# EAGLE board display-demo (EAGLE 4.16)
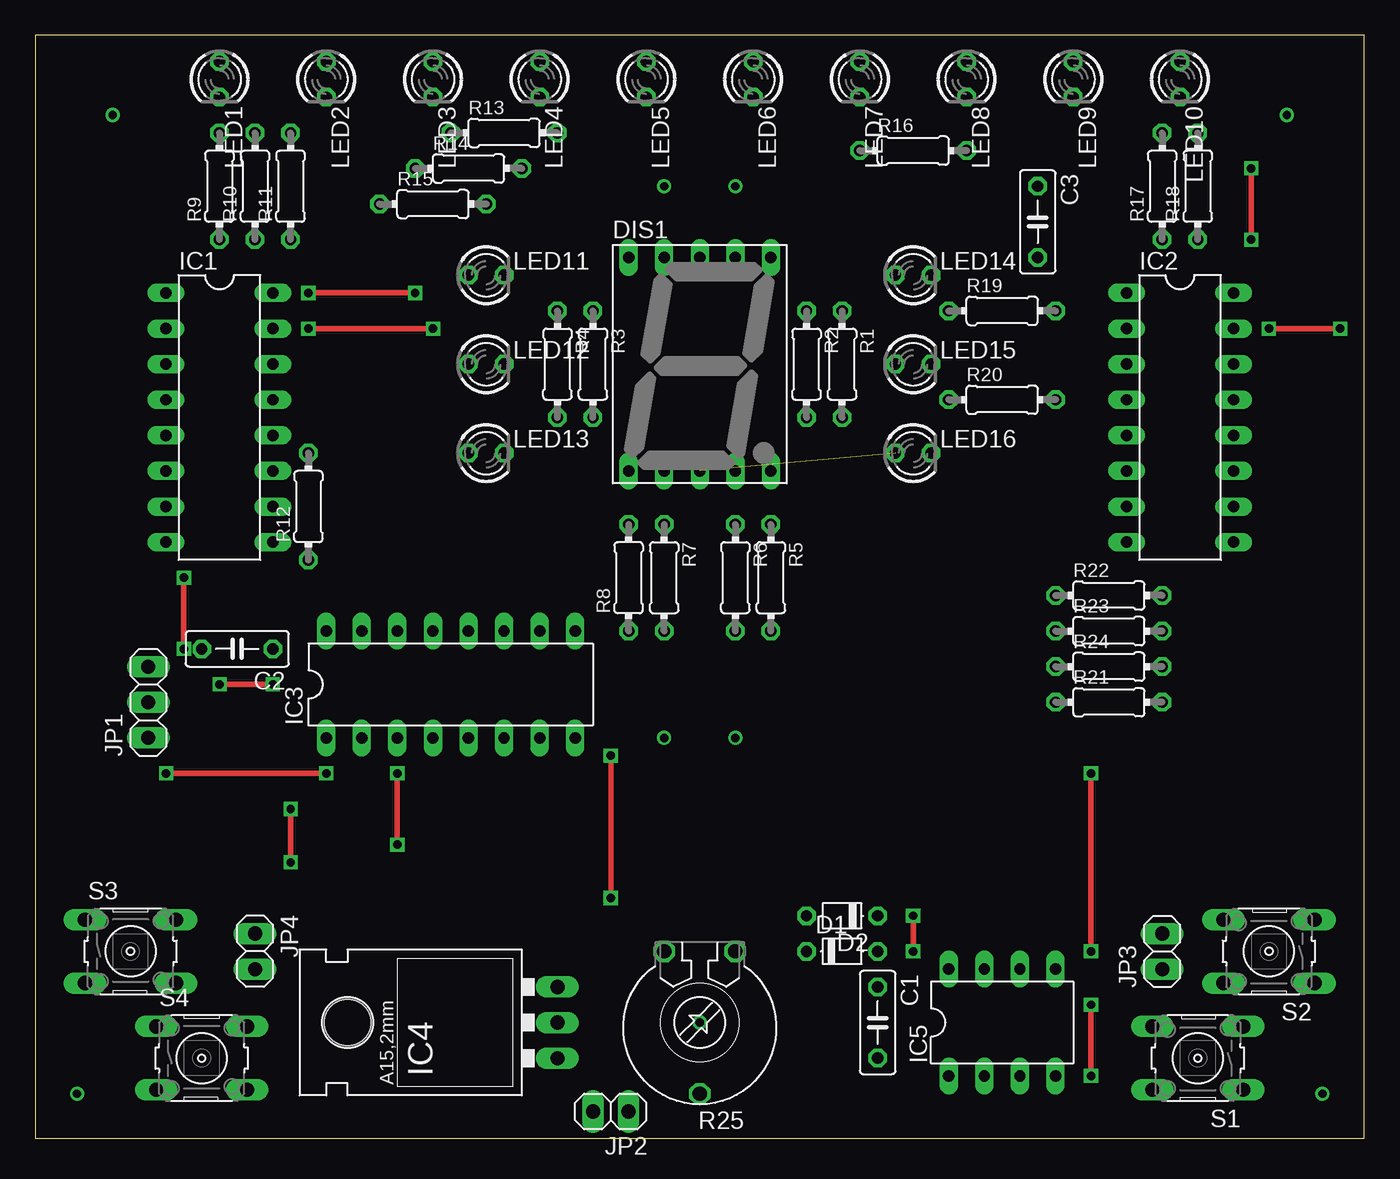
[diagram p0: board, top side]
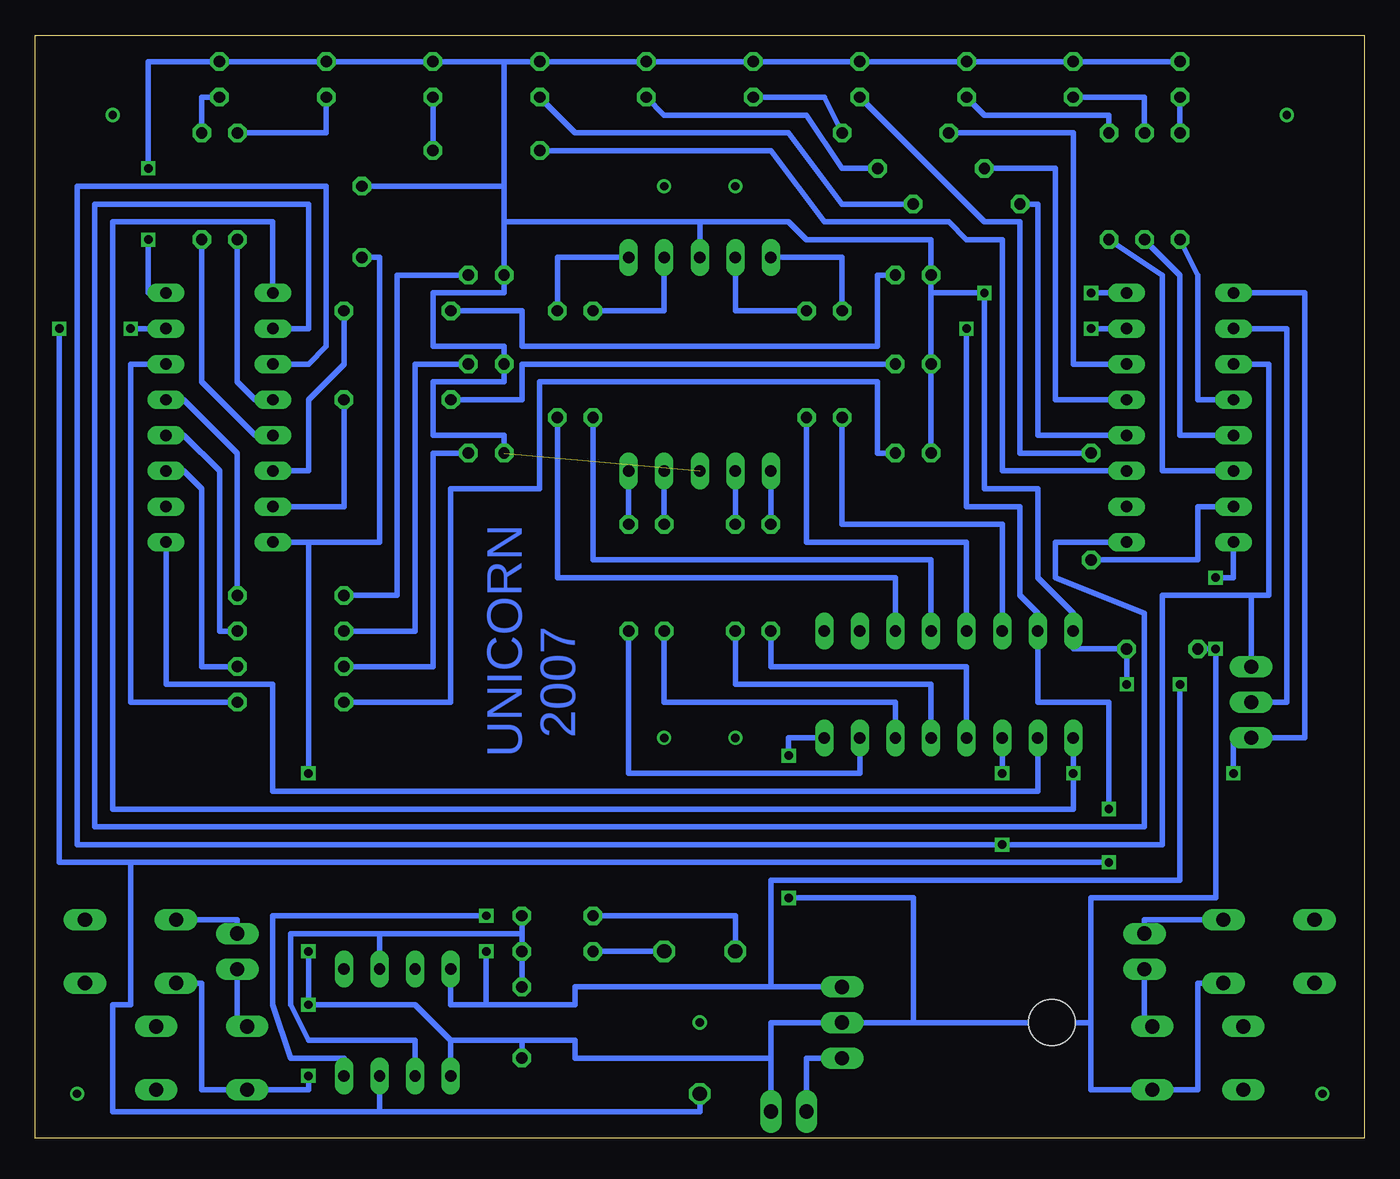
[diagram p1: board, bottom side, seen from below]

Size 94.92 x 78.73 mm. Coordinates in mm from the lower left corner, seen from the top.
Outline: 0,0 94.92,0 94.92,78.73 0,78.73 0,0
Copper layers (1*16): Top 0.035mm / dielectric 1.5mm / Bottom 0.035mm
Design rules "default": minimum track width 10mil, minimum drill 24mil, track to track 8mil, track to pad 8mil, pad to pad 8mil, via to via 8mil, smd to smd 8mil, copper to edge 40mil, drill to drill 8mil, minimum pad ring 10mil, minimum via ring 8mil, stop-mask expansion 4mil, vias tented up to drill 0mil, thermal gap 10mil

## Footprints (pad centres in the part's own frame; a part is rotated, then mirrored left to right if it is on the bottom)
C050-025X075 = drill 0.813 octagon: 1 -2.54,0; 2 2.54,0
D-5 = drill 0.813 octagon: A 2.54,0; C -2.54,0
HDSP-M = drill 0.813 long: 1 -5.08,-7.62; 2 -2.54,-7.62; 3 0,-7.62; 4 2.54,-7.62; 5 5.08,-7.62; 6 5.08,7.62; 7 2.54,7.62; 8 0,7.62; 9 -2.54,7.62; 10 -5.08,7.62
DIL16 = drill 0.813 long: 1 -8.89,-3.81; 2 -6.35,-3.81; 3 -3.81,-3.81; 4 -1.27,-3.81; 5 1.27,-3.81; 6 3.81,-3.81; 7 6.35,-3.81; 8 8.89,-3.81; 9 8.89,3.81; 10 6.35,3.81; 11 3.81,3.81; 12 1.27,3.81; 13 -1.27,3.81; 14 -3.81,3.81; 15 -6.35,3.81; 16 -8.89,3.81
78XXL = drill 1.016 long: GND 0,-3.81; IN -2.54,-3.81; OUT 2.54,-3.81 | hole 3.302: 0,11.176
DIL08 = drill 0.813 long: 1 -3.81,-3.81; 2 -1.27,-3.81; 3 1.27,-3.81; 4 3.81,-3.81; 5 3.81,3.81; 6 1.27,3.81; 7 -1.27,3.81; 8 -3.81,3.81
1X03 = drill 1.016 long: 1 -2.54,0; 2 0,0; 3 2.54,0
1X02 = drill 1.016 long: 1 -1.27,0; 2 1.27,0
LED3MM = drill 0.813 octagon: A -1.27,0; K 1.27,0
0204/7 = drill 0.813 octagon: 1 -3.81,0; 2 3.81,0
PT-10 = drill 1.016 octagon: A -2.54,-5.08; E 2.54,-5.08; S 0,5.08
B3F-10XX = drill 1.016 long: 1 -3.251,2.261; 2 3.251,2.261; 3 -3.251,-2.261; 4 3.251,-2.261

## Placement (x,y rotation side)
C1  [C050-025X075]  60.16,8.25 270 top
C2  [C050-025X075]  14.44,34.92 180 top
C3  [C050-025X075]  71.59,65.4 270 top
D1  [D-5]  57.62,13.33 0 top
D2  [D-5]  57.62,15.87 180 top
DIS1  HD-H101  [HDSP-M]  47.46,55.24 0 top
IC1  4094N  [DIL16]  13.17,51.43 270 top
IC2  4094N  [DIL16]  81.75,51.43 270 top
IC3  4094N  [DIL16]  29.68,32.38 0 top
IC4  [78XXL]  33.49,8.25 90 top
IC5  NE555N  [DIL08]  69.05,8.25 0 top
JP1  [1X03]  8.09,31.11 90 top
JP2  [1X02]  41.11,1.9 180 top
JP3  [1X02]  80.48,13.33 90 top
JP4  [1X02]  15.71,13.33 270 top
LED1  [LED3MM]  13.17,75.56 270 top
LED2  [LED3MM]  20.79,75.56 270 top
LED3  [LED3MM]  28.41,75.56 270 top
LED4  [LED3MM]  36.03,75.56 270 top
LED5  [LED3MM]  43.65,75.56 270 top
LED6  [LED3MM]  51.27,75.56 270 top
LED7  [LED3MM]  58.89,75.56 270 top
LED8  [LED3MM]  66.51,75.56 270 top
LED9  [LED3MM]  74.13,75.56 270 top
LED10  [LED3MM]  81.75,75.56 270 top
LED11  [LED3MM]  32.22,61.59 0 top
LED12  [LED3MM]  32.22,55.24 0 top
LED13  [LED3MM]  32.22,48.89 0 top
LED14  [LED3MM]  62.7,61.59 0 top
LED15  [LED3MM]  62.7,55.24 0 top
LED16  [LED3MM]  62.7,48.89 0 top
R1  [0204/7]  57.62,55.24 270 top
R2  [0204/7]  55.08,55.24 270 top
R3  [0204/7]  39.84,55.24 270 top
R4  [0204/7]  37.3,55.24 270 top
R5  [0204/7]  52.54,40 270 top
R6  [0204/7]  50,40 270 top
R7  [0204/7]  44.92,40 270 top
R8  [0204/7]  42.38,40 90 top
R9  [0204/7]  13.17,67.94 90 top
R10  [0204/7]  15.71,67.94 90 top
R11  [0204/7]  18.25,67.94 90 top
R12  [0204/7]  19.52,45.08 90 top
R13  [0204/7]  33.49,71.75 0 top
R14  [0204/7]  30.95,69.21 0 top
R15  [0204/7]  28.41,66.67 0 top
R16  [0204/7]  62.7,70.48 0 top
R17  [0204/7]  80.48,67.94 90 top
R18  [0204/7]  83.02,67.94 90 top
R19  [0204/7]  69.05,59.05 0 top
R20  [0204/7]  69.05,52.7 0 top
R21  [0204/7]  76.67,31.11 0 top
R22  [0204/7]  76.67,38.73 0 top
R23  [0204/7]  76.67,36.19 0 top
R24  [0204/7]  76.67,33.65 0 top
R25  [PT-10]  47.46,8.25 180 top
S1  [B3F-10XX]  83.02,5.71 180 top
S2  [B3F-10XX]  88.1,13.33 180 top
S3  [B3F-10XX]  6.82,13.33 0 top
S4  [B3F-10XX]  11.9,5.71 0 top

## Library data of the parts
C1-C3 R1-R24 = rcl
D1 D2 = diode
DIS1 = display-hp
IC1-IC3 = 40xx
IC4 = v-reg
IC5 = linear
JP1-JP4 = pinhead
LED1-LED16 = led
R25 = pot
S1-S4 = switch-omron

## Nets
0V: C1.2 C2.2 C3.2 IC1.8 IC2.8 IC3.8 IC4.GND IC5.1 JP2.1 S1.2 S2.2 S3.4 S4.4
+5V: C2.1 C3.1 DIS1.3 DIS1.8 IC1.16 IC2.16 IC3.16 IC4.OUT IC5.4 IC5.8 LED1.A LED2.A LED3.A LED4.A LED5.A LED6.A LED7.A LED8.A LED9.A LED10.A LED11.A LED12.A LED13.A LED14.A LED15.A LED16.A
+12V: IC4.IN JP2.2
N$1: IC1.4 R9.1
N$2: IC1.5 R10.1
N$3: IC1.6 R11.1
N$4: IC1.7 R12.1
N$5: IC1.14 R13.1
N$6: IC1.13 R14.1
N$7: IC1.12 R15.1
N$8: IC1.11 R16.1
N$9: IC2.4 R17.1
N$10: IC2.5 R18.1
N$11: IC1.9 IC2.2
N$12: IC2.9 IC3.2
N$14: IC1.1 IC2.1 IC3.1 JP1.1
N$15: DIS1.1 R8.2
N$16: DIS1.2 R7.1
N$17: DIS1.4 R6.1
N$18: D1.C R25.A
N$19: DIS1.6 R1.1
N$20: DIS1.7 R2.1
N$21: IC3.5 R7.2
N$22: IC3.4 R8.1
N$23: DIS1.9 R3.1
N$24: IC3.6 R6.2
N$25: IC3.7 R5.2
N$26: IC3.14 R4.2
N$27: IC3.13 R3.2
N$28: IC3.12 R2.2
N$29: IC3.11 R1.2
N$30: DIS1.5 R5.1
N$31: LED1.K R9.2
N$32: LED2.K R10.2
N$33: LED3.K R11.2
N$34: LED4.K R12.2
N$35: LED5.K R13.2
N$36: LED6.K R14.2
N$37: LED7.K R15.2
N$38: LED8.K R16.2
N$39: LED9.K R17.2
N$40: LED10.K R18.2
N$41: JP3.2 S2.4
N$42: IC1.3 IC2.3 IC3.3 JP1.3
N$43: IC1.15 IC2.15 IC3.15 IC5.3 R25.S
N$44: IC2.6 R19.2
N$45: IC2.7 R20.2
N$46: IC2.14 R21.2
N$47: IC2.13 R22.2
N$48: IC2.12 R23.2
N$49: IC2.11 R24.2
N$50: LED16.K R24.1
N$51: LED15.K R23.1
N$52: LED14.K R22.1
N$53: LED13.K R21.1
N$54: LED12.K R20.1
N$55: LED11.K R19.1
N$56: JP3.1 S1.4
N$57: JP4.2 S4.2
N$58: JP4.1 S3.2
N$59: D2.A R25.E
N$61: DIS1.10 R4.1
N$62: C1.1 D1.A D2.C IC5.2 IC5.6
N$67: IC1.2 JP1.2

## Tracks (layer width: path | path; a pad name or v marks a point on that pad's centre or on a via)
0V  (via drill 0.6)
  Top 0.406: v10.63,34.92 v10.63,40 | v75.4,13.33 v75.4,26.03 | v41.11,17.14 v41.11,27.3 | v75.4,9.52 v75.4,4.44
  Bottom 0.406: 75.4,42.54 IC2.8 | 42.38,5.71 JP2.1 | 19.52,8.25 19.52,3.45 S4.4 11.9,3.45 11.9,11.07 S3.4 | 19.52,8.25 v22.06,8.25 32.22,8.25 | 32.22,8.25 IC4.GND 42.38,8.25 42.38,5.71 | 42.38,5.71 56.35,5.71 56.35,6.98 60.16,6.98 | 60.16,6.98 C1.2 | 60.16,6.98 65.24,6.98 | 65.24,6.98 67.78,9.52 v75.4,9.52 v75.4,13.33 | 65.24,6.98 IC5.1 | v10.63,40 9.36,40 IC1.8 | v75.4,26.03 75.4,42.54 | 19.52,8.25 19.52,17.14 10.63,17.14 v10.63,34.92 C2.2 | IC3.8 41.11,28.57 v41.11,27.3 | v41.11,17.14 32.22,17.14 32.22,8.25 | 75.4,42.54 70.32,42.54 70.32,62.86 C3.2 | S2.2 83.02,11.07 83.02,3.45 S1.2 75.4,3.45 v75.4,4.44
+5V  (via drill 0.6)  (1 unrouted)
  Top 0.406: v27.14,60.32 v19.52,60.32 | v86.83,69.21 v86.83,64.13 | v13.17,32.38 v16.98,32.38 | v62.7,13.33 v62.7,15.87
  Bottom 0.406: LED2.A LED1.A | LED3.A LED2.A | LED4.A LED3.A | LED5.A LED4.A | LED6.A LED5.A | LED7.A LED6.A | LED8.A LED9.A | LED9.A LED10.A 86.83,76.83 v86.83,69.21 | LED3.A LED2.A | LED4.A LED3.A | LED5.A LED4.A | LED6.A LED5.A | LED7.A LED6.A | 61.43,76.83 LED7.A | 61.43,76.83 LED8.A | LED8.A LED9.A | LED13.A LED12.A 30.95,60.32 | 47.46,65.4 41.11,65.4 39.84,64.13 30.95,64.13 LED11.A 30.95,60.32 | 47.46,65.4 DIS1.8 | 61.43,65.4 LED14.A 61.43,60.32 66.51,60.32 66.51,56.51 61.43,56.51 LED15.A 61.43,53.97 66.51,53.97 66.51,50.16 61.43,50.16 LED16.A | 47.46,65.4 61.43,65.4 | 42.38,10.79 56.35,10.79 56.35,9.52 62.7,9.52 | 62.7,9.52 65.24,9.52 IC5.8 | 61.43,65.4 61.43,67.94 | 61.43,67.94 61.43,76.83 | v19.52,60.32 IC1.16 | IC2.16 86.83,60.32 v86.83,64.13 | 30.95,60.32 v27.14,60.32 27.14,46.35 23.33,46.35 23.33,40 20.79,37.46 IC3.16 20.79,34.92 C2.1 v16.98,32.38 | 61.43,67.94 C3.1 | 42.38,10.79 IC4.OUT | 42.38,10.79 42.38,18.41 13.17,18.41 v13.17,32.38 | IC5.4 72.86,5.71 76.67,5.71 77.94,9.52 77.94,15.87 v62.7,15.87 | 62.7,9.52 v62.7,13.33
+12V
  Bottom 0.406: JP2.2 39.84,5.71 IC4.IN
N$1
  Bottom 0.406: IC1.4 11.9,52.7 11.9,61.59 R9.1
N$2
  Bottom 0.406: R10.1 13.17,61.59 13.17,50.16 IC1.5
N$3
  Bottom 0.406: R11.1 14.44,61.59 14.44,47.62 IC1.6
N$4
  Bottom 0.406: R12.1 11.9,41.27 11.9,45.08 IC1.7
N$5
  Bottom 0.406: R13.1 20.79,71.75 20.79,55.24 IC1.14
N$6
  Bottom 0.406: R14.1 22.06,69.21 22.06,52.7 IC1.13
N$7
  Bottom 0.406: R15.1 23.33,66.67 23.33,50.16 IC1.12
N$8
  Bottom 0.406: R16.1 42.38,70.48 38.57,65.4 29.68,65.4 28.41,64.13 25.87,64.13 25.87,47.62 IC1.11
N$9
  Bottom 0.406: R17.1 80.48,53.97 79.21,52.7 IC2.4
N$10
  Bottom 0.406: R18.1 83.02,53.97 79.21,50.16 IC2.5
N$11
  Bottom 0.406: IC2.2 75.4,57.78 75.4,66.67 90.64,66.67 90.64,22.22 15.71,22.22 15.71,37.46 22.06,40 22.06,42.54 IC1.9
N$12
  Bottom 0.406: IC3.2 23.33,24.76 77.94,24.76 77.94,32.38 85.56,32.38 IC2.9
N$13  (via drill 0.6)
  other vias: 91.91,3.17
N$14  (via drill 0.6)
  Top 0.406: v9.36,26.03 v20.79,26.03
  Bottom 0.406: IC2.1 77.94,65.4 89.37,65.4 89.37,23.49 20.79,23.49 v20.79,26.03 IC3.1 | IC1.1 4.28,60.32 4.28,28.57 JP1.1 9.36,28.57 v9.36,26.03
N$15
  Bottom 0.406: R8.2 DIS1.1
N$16
  Bottom 0.406: R7.1 DIS1.2
N$17
  Bottom 0.406: R6.1 DIS1.4
N$18
  Bottom 0.406: R25.A D1.C
N$19
  Bottom 0.406: R1.1 57.62,62.86 DIS1.6
N$20
  Bottom 0.406: R2.1 50,59.05 DIS1.7
N$21
  Bottom 0.406: IC3.5 30.95,32.38 44.92,32.38 R7.2
N$22
  Bottom 0.406: IC3.4 28.41,33.65 42.38,33.65 R8.1
N$23
  Bottom 0.406: R3.1 44.92,59.05 DIS1.9
N$24
  Bottom 0.406: IC3.6 33.49,31.11 50,31.11 R6.2
N$25
  Bottom 0.406: IC3.7 36.03,26.03 52.54,26.03 R5.2
N$26
  Bottom 0.406: IC3.14 25.87,43.81 37.3,43.81 R4.2
N$27
  Bottom 0.406: IC3.13 28.41,42.54 39.84,42.54 R3.2
N$28
  Bottom 0.406: IC3.12 30.95,41.27 55.08,41.27 R2.2
N$29
  Bottom 0.406: IC3.11 33.49,40 57.62,40 R1.2
N$30
  Bottom 0.406: R5.1 DIS1.5
N$31
  Bottom 0.406: R9.2 LED1.K
N$32
  Bottom 0.406: R10.2 15.71,74.29 LED2.K
N$33
  Bottom 0.406: R11.2 18.25,73.02 27.14,73.02 LED3.K
N$34
  Bottom 0.406: LED4.K 27.14,65.4 24.6,65.4 24.6,48.89 R12.2
N$35
  Bottom 0.406: R13.2 38.57,74.29 LED5.K
N$36
  Bottom 0.406: R14.2 37.3,69.21 39.84,73.02 50,73.02 LED6.K
N$37
  Bottom 0.406: R15.2 37.3,66.67 41.11,71.75 56.35,71.75 LED7.K
N$38
  Bottom 0.406: R16.2 LED8.K
N$39
  Bottom 0.406: LED9.K 74.13,71.75 R17.2
N$40
  Bottom 0.406: LED10.K 83.02,74.29 R18.2
N$41
  Bottom 0.406: S2.4 80.48,15.59 JP3.2
N$42  (via drill 0.6)
  Top 0.406: v25.87,20.95 v25.87,26.03
  Bottom 0.406: IC1.3 6.82,55.24 6.82,38.73 | 6.82,38.73 14.44,38.73 14.44,20.95 v25.87,20.95 91.91,20.95 91.91,67.94 74.13,67.94 74.13,56.51 75.4,55.24 IC2.3 | v25.87,26.03 IC3.3 | JP1.3 8.09,38.73 6.82,38.73
N$43  (via drill 0.6)
  Top 0.406: v28.41,57.78 v19.52,57.78 | v93.18,57.78 v88.1,57.78 | v18.25,19.68 v18.25,23.49
  Bottom 0.406: R25.S 47.46,1.9 70.32,1.9 | 70.32,1.9 IC5.3 | v28.41,57.78 28.41,45.08 24.6,45.08 24.6,38.73 23.33,37.46 IC3.15 23.33,31.11 18.25,31.11 v18.25,23.49 | v19.52,57.78 IC1.15 | v88.1,57.78 IC2.15 | v93.18,57.78 93.18,19.68 88.1,19.68 | v18.25,19.68 88.1,19.68 | 88.1,19.68 88.1,9.52 89.37,9.52 89.37,1.9 70.32,1.9
N$44
  Bottom 0.406: R19.2 72.86,55.24 75.4,52.7 75.4,47.62 IC2.6
N$45
  Bottom 0.406: R20.2 72.86,45.08 IC2.7
N$46
  Bottom 0.406: R21.2 88.1,31.11 88.1,55.24 IC2.14
N$47
  Bottom 0.406: R22.2 80.48,48.89 84.29,52.7 IC2.13
N$48
  Bottom 0.406: R23.2 81.75,36.19 81.75,47.62 84.29,50.16 IC2.12
N$49
  Bottom 0.406: R24.2 83.02,33.65 83.02,46.35 84.29,47.62 IC2.11
N$50
  Bottom 0.406: LED16.K 66.51,48.89 66.51,33.65 R24.1
N$51
  Bottom 0.406: LED15.K 67.78,55.24 67.78,36.19 R23.1
N$52
  Bottom 0.406: LED14.K 69.05,61.59 69.05,38.73 R22.1
N$53
  Bottom 0.406: LED13.K 34.76,48.89 34.76,53.97 58.89,53.97 58.89,46.35 65.24,46.35 65.24,31.11 R21.1
N$54
  Bottom 0.406: LED12.K 60.16,55.24 60.16,52.7 R20.1
N$55
  Bottom 0.406: LED11.K 34.76,61.59 34.76,56.51 60.16,56.51 60.16,59.05 R19.1
N$56
  Bottom 0.406: S1.4 80.48,7.97 JP3.1
N$57
  Bottom 0.406: S4.2 15.71,7.97 JP4.2
N$58
  Bottom 0.406: S3.2 15.71,15.59 JP4.1
N$59
  Bottom 0.406: D2.A 44.92,15.87 R25.E
N$60  (via drill 0.6)
  other vias: 47.46,8.25
N$61
  Bottom 0.406: R4.1 37.3,62.86 DIS1.10
N$62
  Bottom 0.406: D1.A D2.C | D1.A C1.1 | 70.32,14.6 60.16,14.6 D1.A | 70.32,14.6 IC5.6 | 70.32,14.6 76.67,14.6 76.67,9.52 75.4,6.98 67.78,6.98 IC5.2
N$63  (via drill 0.6)
  other vias: 44.92,28.57
N$64  (via drill 0.6)
  other vias: 50,28.57
N$65  (via drill 0.6)
  other vias: 50,67.94
N$66  (via drill 0.6)
  other vias: 44.92,67.94
N$67
  Bottom 0.406: JP1.2 5.55,31.11 5.55,57.78 IC1.2
N$68  (via drill 0.6)
  other vias: 3.01,3.17
N$69  (via drill 0.6)
  other vias: 5.55,73.02
N$70  (via drill 0.6)
  other vias: 89.37,73.02

## Text on the board
Bottom: UNICORN | 2007